# EAGLE board PowerCapV1.1 (EAGLE 7.6.0)
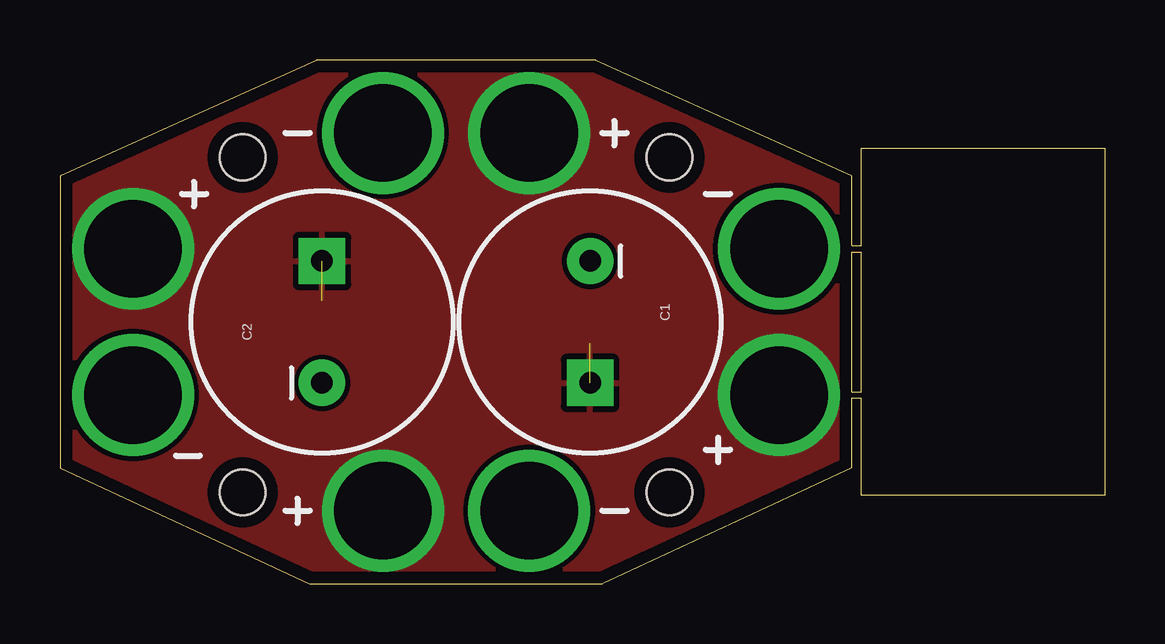
[diagram p0: board, top side]
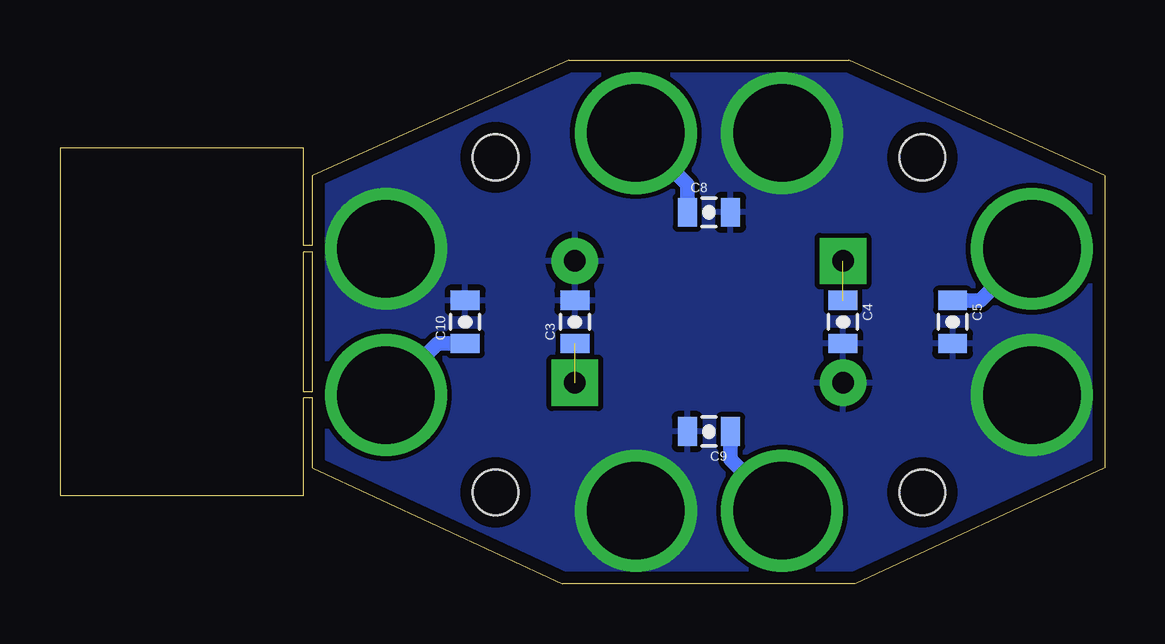
[diagram p1: board, bottom side, seen from below]

Size 43.56 x 21.84 mm. Coordinates in mm from the lower left corner, seen from the top.
Outline: 10.41,0 22.61,0 33.02,4.83 33.02,7.75 33.4,7.75 33.4,3.68 43.56,3.68 43.56,18.16 33.4,18.16 33.4,14.1 33.02,14.1 33.02,17.02 22.35,21.84 10.67,21.84 0,17.02 0,4.83 10.41,0
Outline: 33.02,8 33.02,13.84 33.4,13.84 33.4,8 33.02,8
Copper layers (1*16): Top 0.035mm / dielectric 1.5mm / Bottom 0.035mm
Design rules "default *": minimum track width 10mil, minimum drill 24mil, track to track 8mil, track to pad 8mil, pad to pad 8mil, via to via 8mil, smd to smd 8mil, copper to edge 20mil, drill to drill 8mil, minimum pad ring 10mil, minimum via ring 8mil, stop-mask expansion 4mil, vias tented up to drill 0mil, thermal gap 10mil
Holes 1.91 mm at 7.62,3.81 25.4,3.81 25.4,17.78 7.62,17.78

## Footprints (pad centres in the part's own frame; a part is rotated, then mirrored left to right if it is on the bottom)
CPOL-RADIAL-1000UF-25V = drill 0.9 pad 1.93 square: + 2.54,0 | drill 0.9 pad 1.93: - -2.54,0
0805-CAP = smd 0.8 x 1.2: 1 -0.9,0; 2 0.9,0

## Placement (x,y rotation side)
C1  [CPOL-RADIAL-1000UF-25V]  22.1,10.92 270 top
C2  [CPOL-RADIAL-1000UF-25V]  10.92,10.92 90 top
C3  1uF  [0805-CAP]  22.1,10.92 90 bottom
C4  1uF  [0805-CAP]  10.92,10.92 270 bottom
C5  1uF  [0805-CAP]  6.35,10.92 270 bottom
C8  1uF  [0805-CAP]  16.51,15.49 0 bottom
C9  1uF  [0805-CAP]  16.51,6.35 180 bottom
C10  1uF  [0805-CAP]  26.67,10.92 90 bottom

## Library data of the parts
C1-C5 C8-C10 = SparkFun-Capacitors

## Nets
VABT: C1.- C2.- C3.2 C4.2 C5.2 C8.2 C9.2 C10.2
VBAT: C1.+ C2.+ C3.1 C4.1 C5.1 C8.1 C9.1 C10.1

## Tracks (layer width: path | path; a pad name or v marks a point on that pad's centre or on a via)
VABT  (via drill 4.06)
  other vias: 29.97,13.97 3.05,7.87 19.56,3.05 13.46,18.8
  pour Bottom: 0,17.02 0,4.83 10.41,0 22.61,0 33.02,4.83 33.02,17.02 22.35,21.84 10.67,21.84
VBAT  (via drill 4.06)  (2 unrouted)
  Bottom 0.61: C10.1 27.82,10.02 v29.97,7.87 | C5.1 5.2,11.82 v3.05,13.97 | C8.1 17.41,16.65 v19.56,18.8 | C9.1 15.61,5.2 v13.46,3.05
  pour Top: 0,17.02 10.67,21.84 22.35,21.84 33.02,17.02 33.02,4.83 22.61,0 10.41,0 0,4.83